# Altium PCB POCOPIN线板.PcbDoc
Units mil, origin at the board's own origin, x right, y up, seen from the top; angles counter-clockwise.
Board outline 397.64 x 1338.48 mil, 2 copper layers (Top Layer, Bottom Layer); 4 components, 51 nets, 6 pads, 0 vias.
Unrouted connection lines stored in the file: 2.
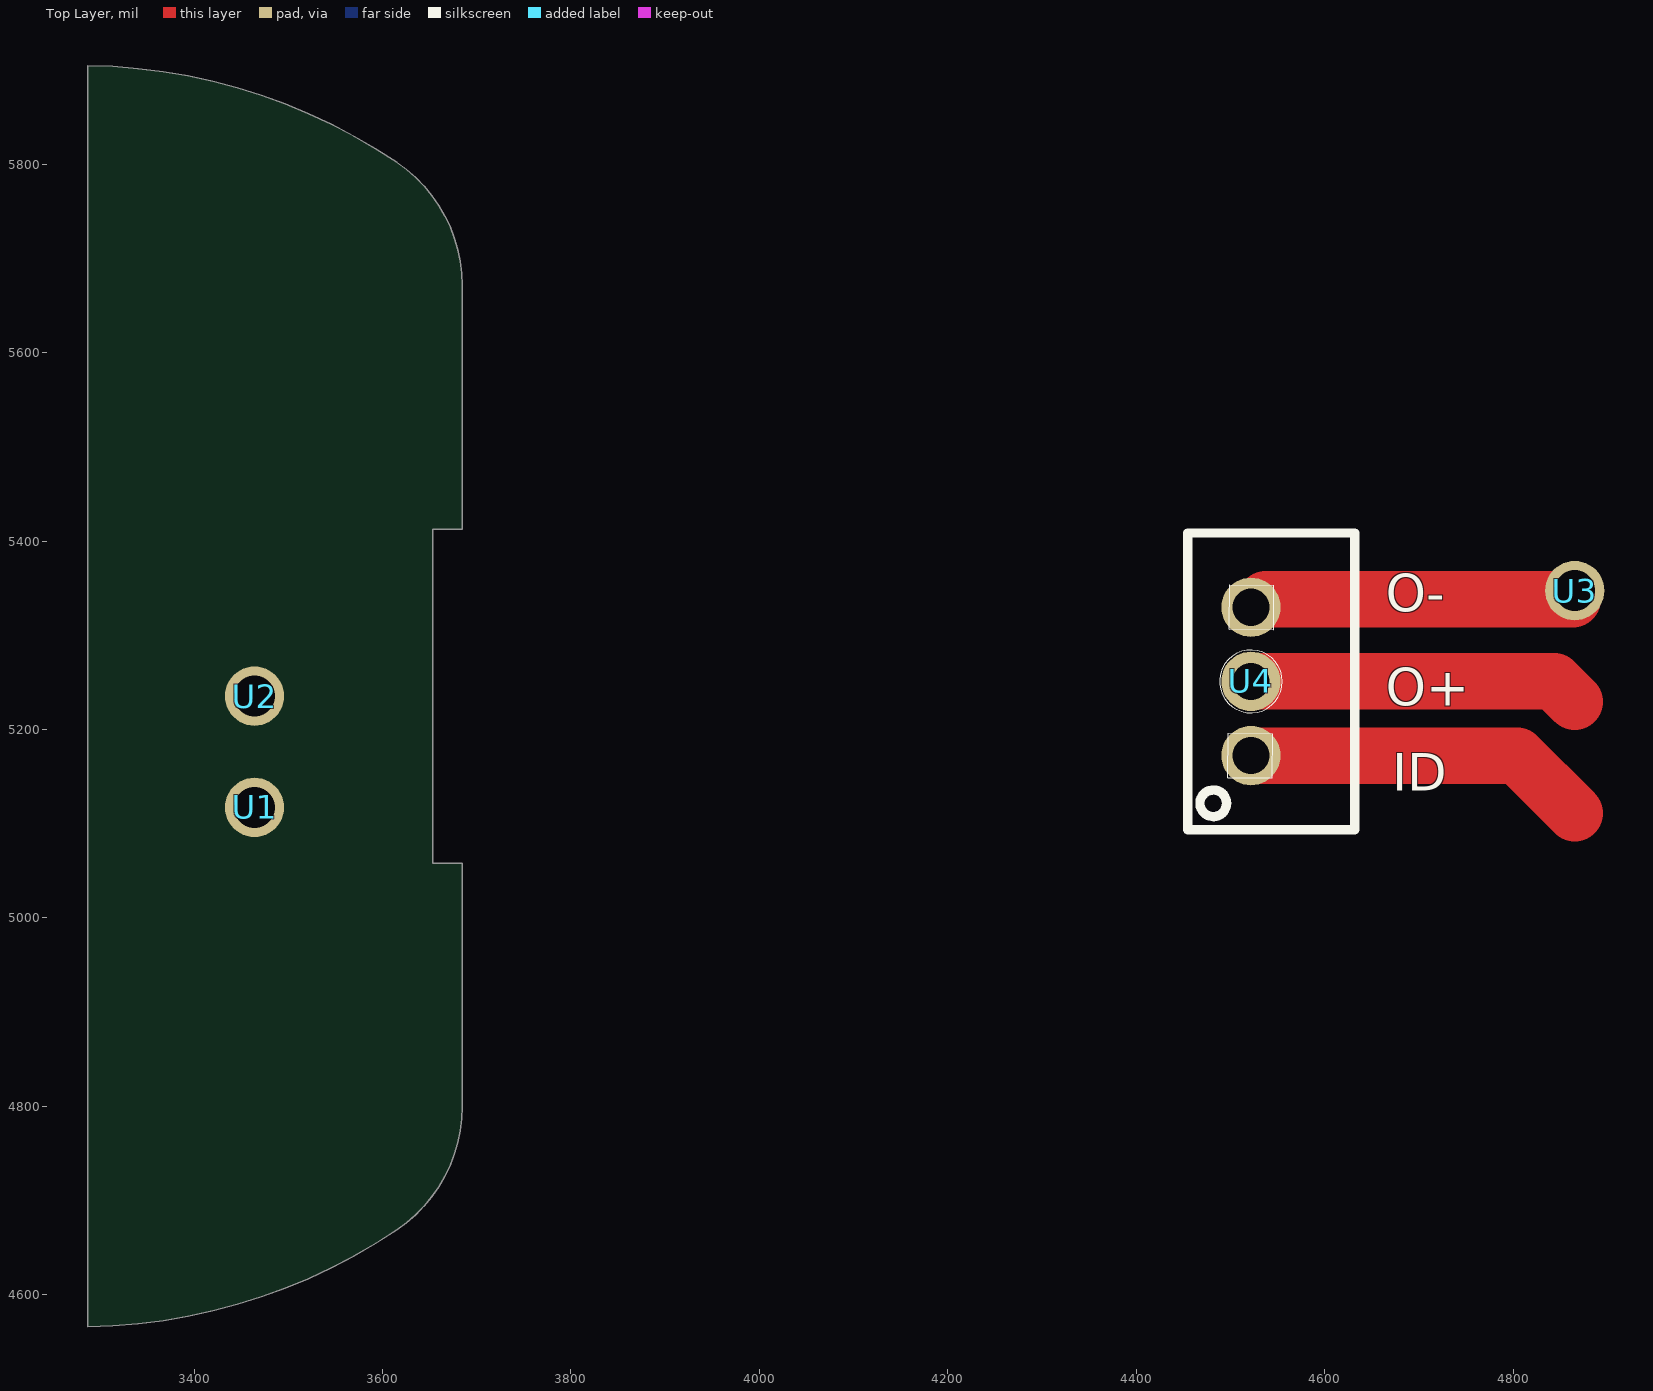
[diagram p0: Top Layer view]
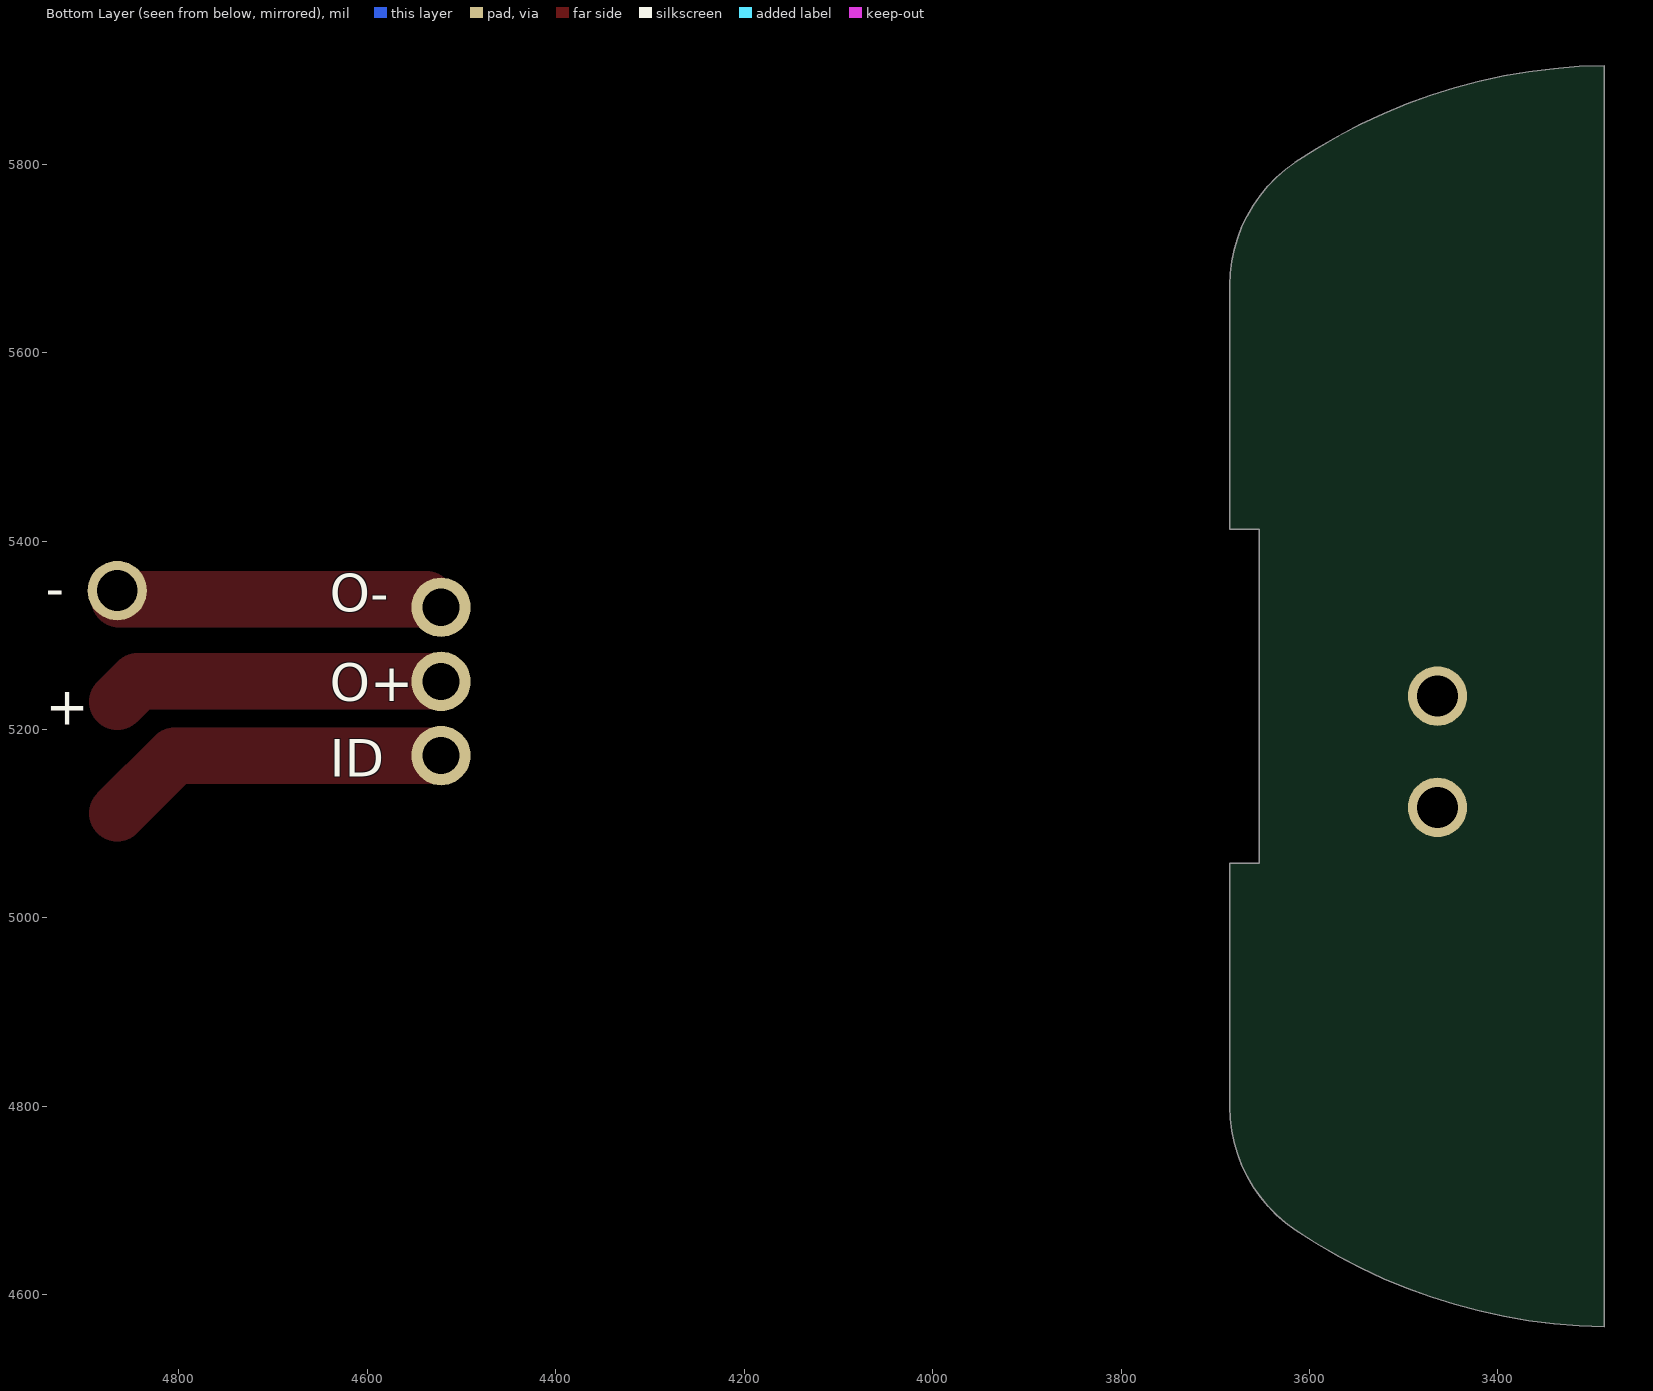
[diagram p1: Bottom Layer view, seen from below]

## Layer stack, top to bottom
Top Solder: solder mask 0.4, Solder Resist, Dk 3.5
Top Layer: signal copper 1.4
Dielectric 1: dielectric 12.6, FR-4, Dk 4.8
Bottom Layer: signal copper 1.4
Bottom Solder: solder mask 0.4, Solder Resist, Dk 3.5

## Board outline
3286.92,4566.14 3286.92,5904.62 cw(c3279.04,5303.83) 3615.18,5801.85 cw(c3527.08,5671.32) 3684.56,5671.32 3684.56,5412.35 3653.06,5412.35 3653.06,5058.02 3684.56,5058.02 3684.56,4799.44 cw(c3527.08,4799.44) 3615.18,4668.91 cw(c3279.04,5166.93)
cut-out: 5363.43,5229.22 ccw(c5408.7,5229.22) 5408.7,5183.95 ccw(c5408.7,5229.22) 5453.98,5229.22 ccw(c5408.7,5229.22) 5408.7,5274.5 ccw(c5408.7,5229.22)

## Design rules (kind name [scope] priority, off if disabled: settings)
Clearance [All] p1: gap=6 ignorepadtopadclearanceinfootprint=FALSE
HoleToHoleClearance [All] p1: gap=6 allowstackedmicrovias=TRUE
MinimumSolderMaskSliver [All] p1: minsoldermaskwidth=0
PolygonConnect [All] p1: connectstyle=Relief reliefconductorwidth=10 reliefentries=4 polygonreliefangle="90 Angle" airgapwidth=10
RoutingVias [All] p1: holewidth=28 width=50 viastyle="Through Hole" minholewidth=28 minwidth=50 maxholewidth=28 maxwidth=50
SilkToSilkClearance [All] p1: silktosilkclearance=0
SilkToSolderMaskClearance [IsPad] p1: minsilkscreentomaskgap=0 clearancetoexposedcopper=TRUE
SolderMaskExpansion [All] p1: expansion=4
Width [All] p1: maxlimit=100 minlimit=10 preferedwidth=10
26 further rules are at their usual default settings.

## Components (designator, comment, footprint, x,y, rotation, side; value= is the part's Value field where it differs from the comment)
U1 "POCOPIN" pocopin焊盘 3464.08,5117.27 r0 top
U2 "POCOPIN" pocopin焊盘 3464.08,5235.38 r0 top
U3 "POCOPIN" pocopin焊盘 4865.4,5347.33 r0 top
U4 "PH2.0-1X3P" CONN-TH_B3B-PH-K-S 4521.7,5250.99 r270 top

## Footprints (in the part's own frame and the unit in brackets; to place one, negate y for a bottom-side part, rotate by r counter-clockwise, add the part's x,y. Pads: shape width x height; smd on the part's side, far side on the other; paste and mask are expansions set on the pad)
CONN-TH_B3B-PH-K-S [mm]
  round 1.6 hole 1: 1(2,0) 2(0,0) 3(-2,0)
  silkscreen extent -4,-1.7 4,2.8
pocopin焊盘 [mm]
  round 1.6 hole 1.1 mask+0.102: 1(0,0)

## Part data
U1 U2 U3: JLCPCB Part Class="Extended Part", LCSC Part Name="POGO PIN弹?", Manufacturer=YIYUAN(怡?, Manufacturer Part=YTC1P-3015-01, Rated Current=2.5A, Rated Voltage=12V, Add into BOM=yes, Contact Material=黄?, Contact Plating=金, Convert to PCB=yes, Datasheet=https://atta.szlcsc.com/upload/public/pdf/source/20221031/BD070516233C1C93A35D01CFB419D0D5.pdf, Device=YTC1P-3015-01, Name=YTC1P-3015-01, Number of Pins=单PIN?, Overall Length/Height=4.5mm, Supplier=LCSC, Supplier Footprint=-, Supplier Part=C5221293, Symbol=YTC1P-3015-01, Type=弹?
U4: JLCPCB Part Class="Extended Part", LCSC Part Name="PH 2mm 1x3P", Manufacturer=JST, Manufacturer Part=B3B-PH-K-S(LF)(SN), Add into BOM=yes, Contact Material=黄?, Convert to PCB=yes, Datasheet=https://atta.szlcsc.com/upload/public/pdf/source/20171026/C131339_15089839676151058812.pdf, Device=B3B-PH-K-S(LF)(SN), Mounting Style=-, Name=B3B-PH-K-S(LF)(SN), Number of PINs Per Row=3, Number of Rows=1, Pins Structure=1x3P, Pitch=2mm, Reference Series=PH, Row Spacing=-, Supplier=LCSC, Supplier Footprint=插件, Supplier Part=C131339, Symbol=B3B-PH-K-S(LF)(SN)

## Nets (pads, with @x,y where several pads share a name; then routed paths per layer and width w, separated by ;. In a path a pad name is that pad's centre, name@x,y a point inside that pad or via, vN(x,y) a via of type N, cw(c..) or ccw(c..) an arc to the next point about the centre after c; other vN are vias at no path point)
3V3: 
5V: 
ADC_BAT: 
CE: 
CHRG: 
CS: 
CSN: 
DC: 
GND: 
IRQ: 
K1: 
K2: 
K3: 
K4: 
K5: 
K6: 
K7: 
K8: 
MISO: 
MOSI: 
NetC5_2: 
NetC10_1: 
NetC10_2: 
NetC11_1: 
NetC11_2: 
NetC15_1: 
NetC20_1: 
NetCN?_10: 
NetCN?_11: 
NetCN?_26: 
NetD1_1: 
NetD2_1: 
NetD2_2: 
NetMCU1_31: 
NetQ3_1: 
NetR20_2: 
NetR21_1: 
NetU1_1: U1.1 U4.1 | length 369
  Top Layer w60: U4.1 4804.26,5172.25 4865.4,5111.11
NetU2_1: U2.1 U4.2 | length 352.7
  Top Layer w60: U4.2 4843.63,5250.99 4865.4,5229.22
NetU3_1: U3.1 U4.3 | length 351
  Top Layer w15: U4.3 U4.3@4530.5,5338.53 ; U3.1@4848.69,5345.59 U3.1@4857.49,5354.39
  Top Layer w60: U4.3@4537.2,5338.26 U3.1@4863.29,5338.26
NREST: 
PWR_HOLD: 
PWR_TEST: 
RES: 
RXD1: 
SCK: 
SWCLK: 
SWDIO: 
TXD1: 
VBAT: 
VCC: 

## Silkscreen, mask and mechanical layers (free items; w line width, h text height)
Top Overlay:
  circle w0.5: c4521.7,5250.99 r33.3
  lines w0.5: 4497.26,5148.91 4544.35,5148.5 4544.76,5195.59 4497.68,5196 4497.26,5148.91 ; 4498.64,5306.39 4545.72,5305.98 4546.14,5353.06 4499.05,5353.47 4498.64,5306.39
  text "O-" at 4960,5330 h40
  text "O-" at 4665,5325 h40
  text "O+" at 4665,5225 h40
  text "O+" at 4960,5205 h40
  text "ID" at 4671.66,5135 h40
  text "ID" at 4960,5100 h40
Bottom Overlay:
  text "O-" at 4985,5330 h40
  text "O-" at 4640,5325 h40
  text "O+" at 4640,5230 h40
  text "O+" at 4985,5205 h40
  text "ID" at 4640,5150 h40
  text "ID" at 5025,5100 h40
Mechanical 1:
  circle w10: c3375.5,5235.38 r15.75
  circle w10: c3375.5,5353.49 r15.75
  circle w10: c3375.5,5117.27 r15.75
  circle w10: c3464.08,5117.27 r19.68
  circle w10: c3464.08,5235.38 r19.68
  circle w10: c3464.08,5353.49 r19.68
  circle w10: c3464.08,5778.69 r45.28
  circle w10: c3464.08,4692.07 r45.28
  circle w0.5: c5408.7,5229.22 r45.28
  circle w0.5: c4865.4,5347.33 r19.68
  circle w0.5: c4865.4,5111.11 r19.68
  circle w0.5: c4865.4,5229.22 r19.68
  lines w10: 4196.16,5052.06 5534.64,5052.06 ccw(c4933.85,5044.18) 5431.87,5380.31 ccw(c5301.34,5292.21) 5301.34,5449.69 4429.46,5449.69 ; 3286.92,4566.14 ccw(c3279.04,5166.93) 3615.18,4668.91 ccw(c3527.08,4799.44) 3684.56,4799.44 3684.56,5058.02 3653.06,5058.02 3653.06,5412.35 3684.56,5412.35 3684.56,5671.32 ccw(c3527.08,5671.32) 3615.18,5801.85 ccw(c3279.04,5303.83) 3286.92,5904.62 3286.92,4566.14